# EAGLE board MegaShield (EAGLE 9.5.0)
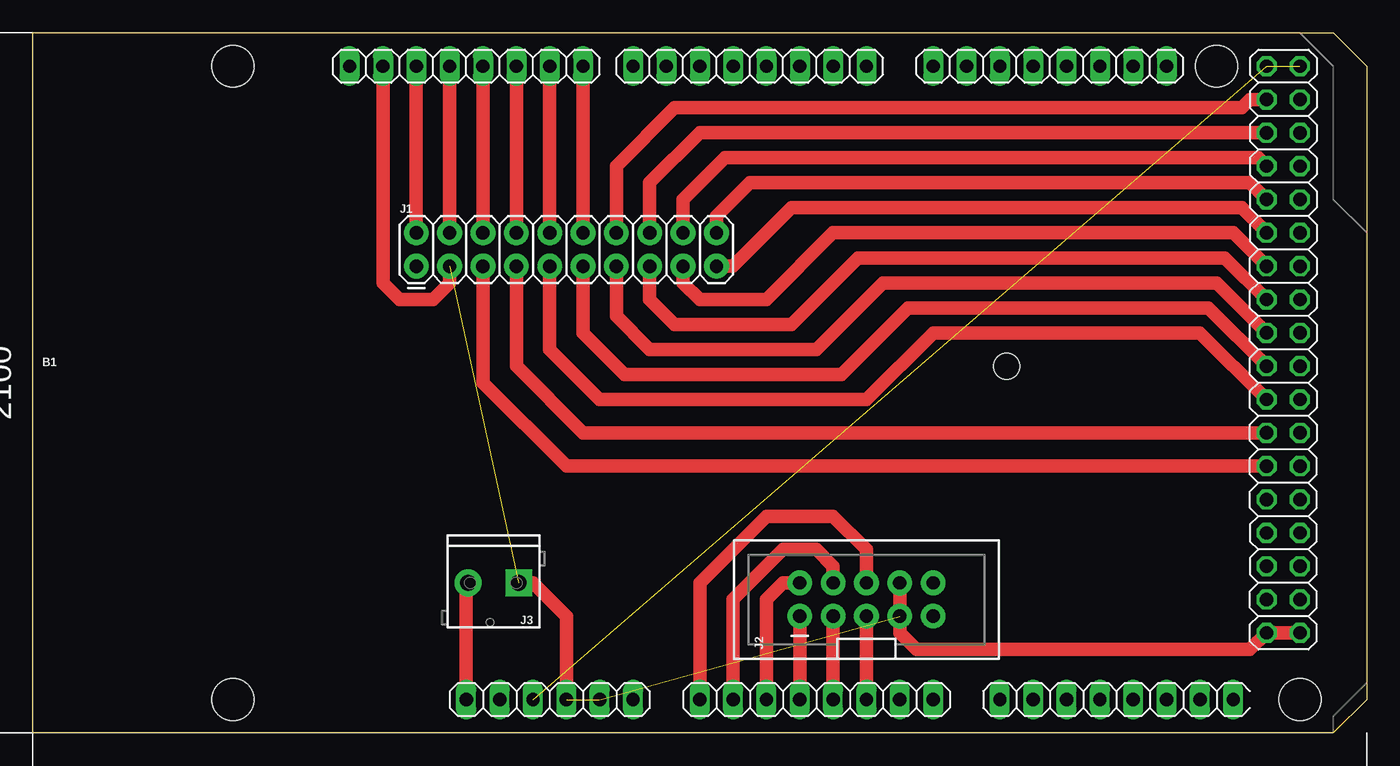
[diagram p0: board, top side]
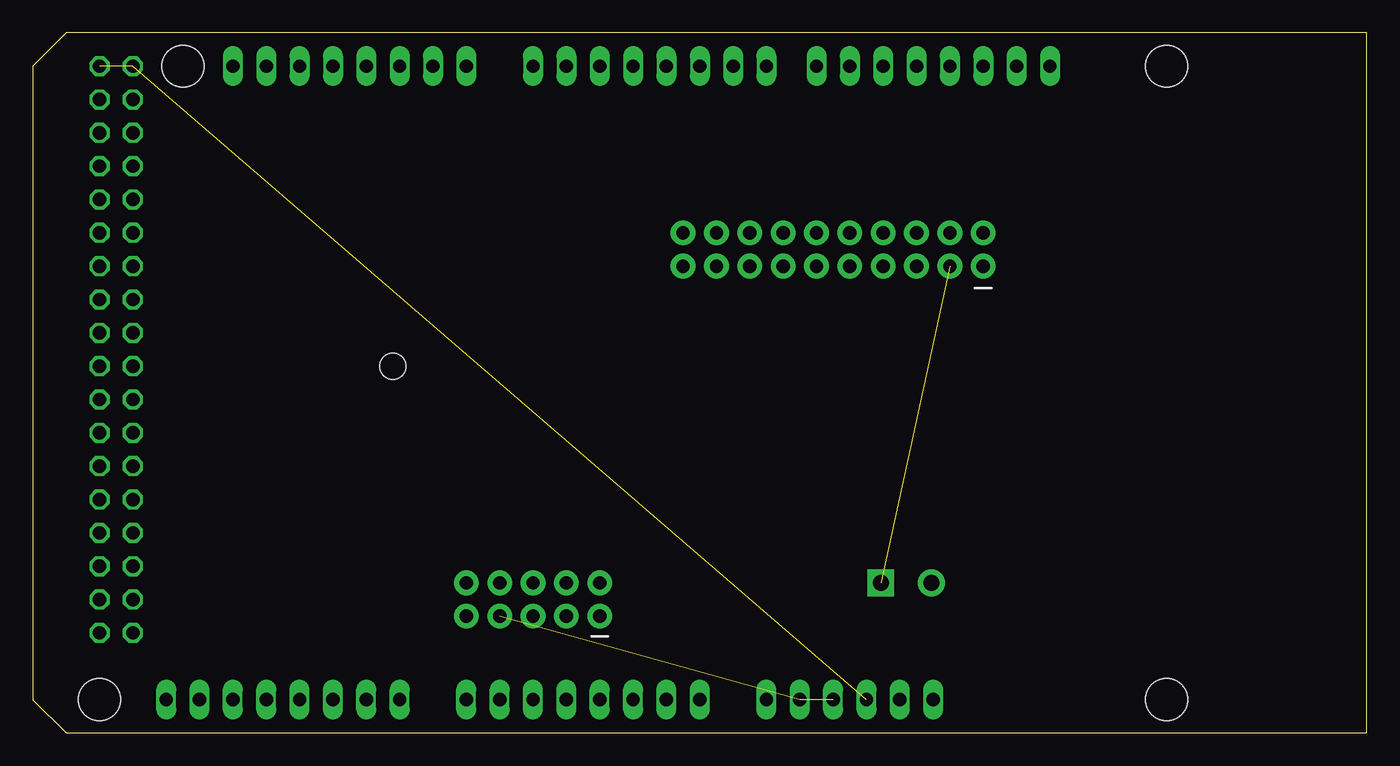
[diagram p1: board, bottom side, seen from below]

Size 101.6 x 53.34 mm. Coordinates in mm from the lower left corner, seen from the top.
Outline: 0,0 0,53.34 99.06,53.34 101.6,50.8 101.6,2.54 99.06,0 0,0
Copper layers (1*16): Top 0.035mm / dielectric 1.5mm / Bottom 0.035mm
Design rules "default": minimum track width 6mil, minimum drill 0.35mm, track to track 6mil, track to pad 6mil, pad to pad 6mil, via to via 6mil, smd to smd 6mil, copper to edge 40mil, drill to drill 6mil, minimum pad ring 10mil, minimum via ring 8mil, stop-mask expansion 4mil, vias tented up to drill 0mil, thermal gap 10mil
Net classes: 0 default: width 1.016 mm, drill 0.762 mm, clearance 0.508 mm

## Footprints (pad centres in the part's own frame; a part is rotated, then mirrored left to right if it is on the bottom)
MEGA_ARDUINO = drill 1.016 long: 1 33.02,2.54; 2 35.56,2.54; 3 38.1,2.54; 4 40.64,2.54; 5 43.18,2.54; 6 45.72,2.54; 7 50.8,2.54; 8 53.34,2.54; 9 55.88,2.54; 10 58.42,2.54; 11 60.96,2.54; 12 63.5,2.54; 13 66.04,2.54; 14 68.58,2.54; 15 73.66,2.54; 16 76.2,2.54; 17 78.74,2.54; 18 81.28,2.54; 19 83.82,2.54; 20 86.36,2.54; 21 88.9,2.54; 22 91.44,2.54; 23 86.36,50.8; 24 83.82,50.8; 25 81.28,50.8; 26 78.74,50.8; 27 76.2,50.8; 28 73.66,50.8; 29 71.12,50.8; 30 68.58,50.8; 31 63.5,50.8; 32 60.96,50.8; 33 58.42,50.8; 34 55.88,50.8; 35 53.34,50.8; 36 50.8,50.8; 37 48.26,50.8; 38 45.72,50.8; 39 41.91,50.8; 40 39.37,50.8; 41 36.83,50.8; 42 34.29,50.8; 43 31.75,50.8; 44 29.21,50.8; 45 26.67,50.8; 46 24.13,50.8 | drill 1.016 octagon: 47 93.98,50.8; 48 96.52,50.8; 49 93.98,48.26; 50 96.52,48.26; 51 93.98,45.72; 52 96.52,45.72; 53 93.98,43.18; 54 96.52,43.18; 55 93.98,40.64; 56 96.52,40.64; 57 93.98,38.1; 58 96.52,38.1; 59 93.98,35.56; 60 96.52,35.56; 61 93.98,33.02; 62 96.52,33.02; 63 93.98,30.48; 64 96.52,30.48; 65 93.98,27.94; 66 96.52,27.94; 67 93.98,25.4; 68 96.52,25.4; 69 93.98,22.86; 70 96.52,22.86; 71 93.98,20.32; 72 96.52,20.32; 73 93.98,17.78; 74 96.52,17.78; 75 93.98,15.24; 76 96.52,15.24; 77 93.98,12.7; 78 96.52,12.7; 79 93.98,10.16; 80 96.52,10.16; 81 93.98,7.62; 82 96.52,7.62 | hole 3.2: 15.24,50.8; 15.24,2.54; 90.17,50.8; 96.52,2.54 | hole 2: 74.168,27.94
2X10 = drill 1.016 pad 1.88: 1 0,0; 2 0,2.54; 3 2.54,0; 4 2.54,2.54; 5 5.08,0; 6 5.08,2.54; 7 7.62,0; 8 7.62,2.54; 9 10.16,0; 10 10.16,2.54; 11 12.7,0; 12 12.7,2.54; 13 15.24,0; 14 15.24,2.54; 15 17.78,0; 16 17.78,2.54; 17 20.32,0; 18 20.32,2.54; 19 22.86,0; 20 22.86,2.54
2X5-SHROUDED = drill 1.016 pad 1.88: 1 -1.27,5.08; 2 1.27,5.08; 3 -1.27,2.54; 4 1.27,2.54; 5 -1.27,0; 6 1.27,0; 7 -1.27,-2.54; 8 1.27,-2.54; 9 -1.27,-5.08; 10 1.27,-5.08
SCREWTERMINAL-3.5MM-2_LOCK = drill 1.2 pad 2.032 square: 1 -0.178,0 | drill 1.2 pad 2.032: 2 3.678,0

## Placement (x,y rotation side)
B1  [MEGA_ARDUINO]  0,0 0 top
J1  [2X10]  29.21,35.56 0 top
J2  [2X5-SHROUDED]  63.5,10.16 90 top
J3  [SCREWTERMINAL-3.5MM-2_LOCK]  36.83,11.43 180 top

## Library data of the parts
B1 = arduino
J1 = SparkFun-Connectors
J2 = SparkFun-Connectors; PROD_ID: CONN-08671; SF_ID: PRT-08506
J3 = SparkFun-Connectors; PROD_ID: CONN-08399

## Nets
+3V3: B1.2
+5V: B1.3 B1.47 B1.48
+VIN: B1.6
GND: B1.4 B1.5 B1.45 B1.81 B1.82 J1.3 J2.7 J2.8 J3.1
M1A: B1.49 J1.14
M1B: B1.51 J1.16
M1POT: B1.7 J2.6
M1PWM: B1.39 J1.12
M2A: B1.53 J1.18
M2B: B1.55 J1.20
M2POT: B1.8 J2.4
M2PWM: B1.40 J1.10
M3A: B1.57 J1.19
M3B: B1.59 J1.17
M3POT: B1.9 J2.2
M3PWM: B1.41 J1.8
M4A: B1.61 J1.15
M4B: B1.63 J1.13
M4POT: B1.10 J2.1
M4PWM: B1.42 J1.6
M5A: B1.65 J1.11
M5B: B1.67 J1.9
M5POT: B1.11 J2.3
M5PWM: B1.43 J1.4
M6A: B1.69 J1.7
M6B: B1.71 J1.5
M6POT: B1.12 J2.5
M6PWM: B1.44 J1.2
N$1: J1.1
N$2: B1.1 J3.2

## Tracks (layer width: path | path; a pad name or v marks a point on that pad's centre or on a via)
+5V  (2 unrouted)
GND  (3 unrouted)
  Top 1.016: B1.45 26.67,34.29 27.94,33.02 30.48,33.02 31.75,34.29 J1.3 | B1.82 B1.81 92.71,6.35 67.31,6.35 66.04,7.62 J2.7 J2.8 | B1.4 40.64,8.89 38.1,11.43 J3.1
M1A
  Top 1.016: J1.14 44.45,43.18 48.9,47.62 92.08,47.62 92.71,48.26 B1.49
M1B
  Top 1.016: B1.51 50.8,45.72 46.99,41.91 J1.16
M1POT
  Top 1.016: B1.7 50.8,11.43 55.88,16.51 60.96,16.51 63.5,13.97 J2.6
M1PWM
  Top 1.016: J1.12 B1.39
M2A
  Top 1.016: J1.18 49.53,40.64 52.7,43.81 93.34,43.81 B1.53
M2B
  Top 1.016: J1.20 52.07,39.37 54.61,41.91 92.71,41.91 B1.55
M2POT
  Top 1.016: B1.8 53.34,10.16 57.15,13.97 59.69,13.97 60.96,12.7 J2.4
M2PWM
  Top 1.016: J1.10 B1.40
M3A
  Top 1.016: J1.19 53.34,35.56 57.78,40.01 92.08,40.01 B1.57
M3B
  Top 1.016: B1.59 91.44,38.1 60.96,38.1 55.88,33.02 50.8,33.02 49.53,34.29 J1.17
M3POT
  Top 1.016: B1.9 55.88,10.16 57.15,11.43 J2.2
M3PWM
  Top 1.016: B1.41 J1.8
M4A
  Top 1.016: B1.61 90.81,36.2 62.87,36.2 57.78,31.11 48.9,31.11 46.99,33.02 J1.15
M4B
  Top 1.016: J1.13 44.45,31.75 46.99,29.21 59.69,29.21 64.77,34.29 90.17,34.29 B1.63
M4POT
  Top 1.016: J2.1 B1.10
M4PWM
  Top 1.016: J1.6 B1.42
M5A
  Top 1.016: J1.11 41.91,30.48 45.09,27.3 61.59,27.3 66.67,32.38 89.53,32.38 B1.65
M5B
  Top 1.016: B1.67 88.9,30.48 68.58,30.48 63.5,25.4 43.18,25.4 39.37,29.21 J1.9
M5POT
  Top 1.016: B1.11 J2.3
M5PWM
  Top 1.016: B1.43 J1.4
M6A
  Top 1.016: B1.69 41.91,22.86 36.83,27.94 J1.7
M6B
  Top 1.016: B1.71 40.64,20.32 34.29,26.67 J1.5
M6POT
  Top 1.016: J2.5 B1.12
M6PWM
  Top 1.016: J1.2 B1.44
N$2
  Top 1.016: B1.1 33.02,11.3 J3.2